# Altium PCB 主板-双BH(1).PcbDoc (part 12 of 13)
Units mm, origin at the board's own origin, x right, y up, seen from the top; angles counter-clockwise.
Board outline 97.69 x 103.45 mm, 2 copper layers (Top Layer, Bottom Layer); 78 components, 75 nets, 243 pads, 279 vias.
Unrouted connection lines stored in the file: 7.
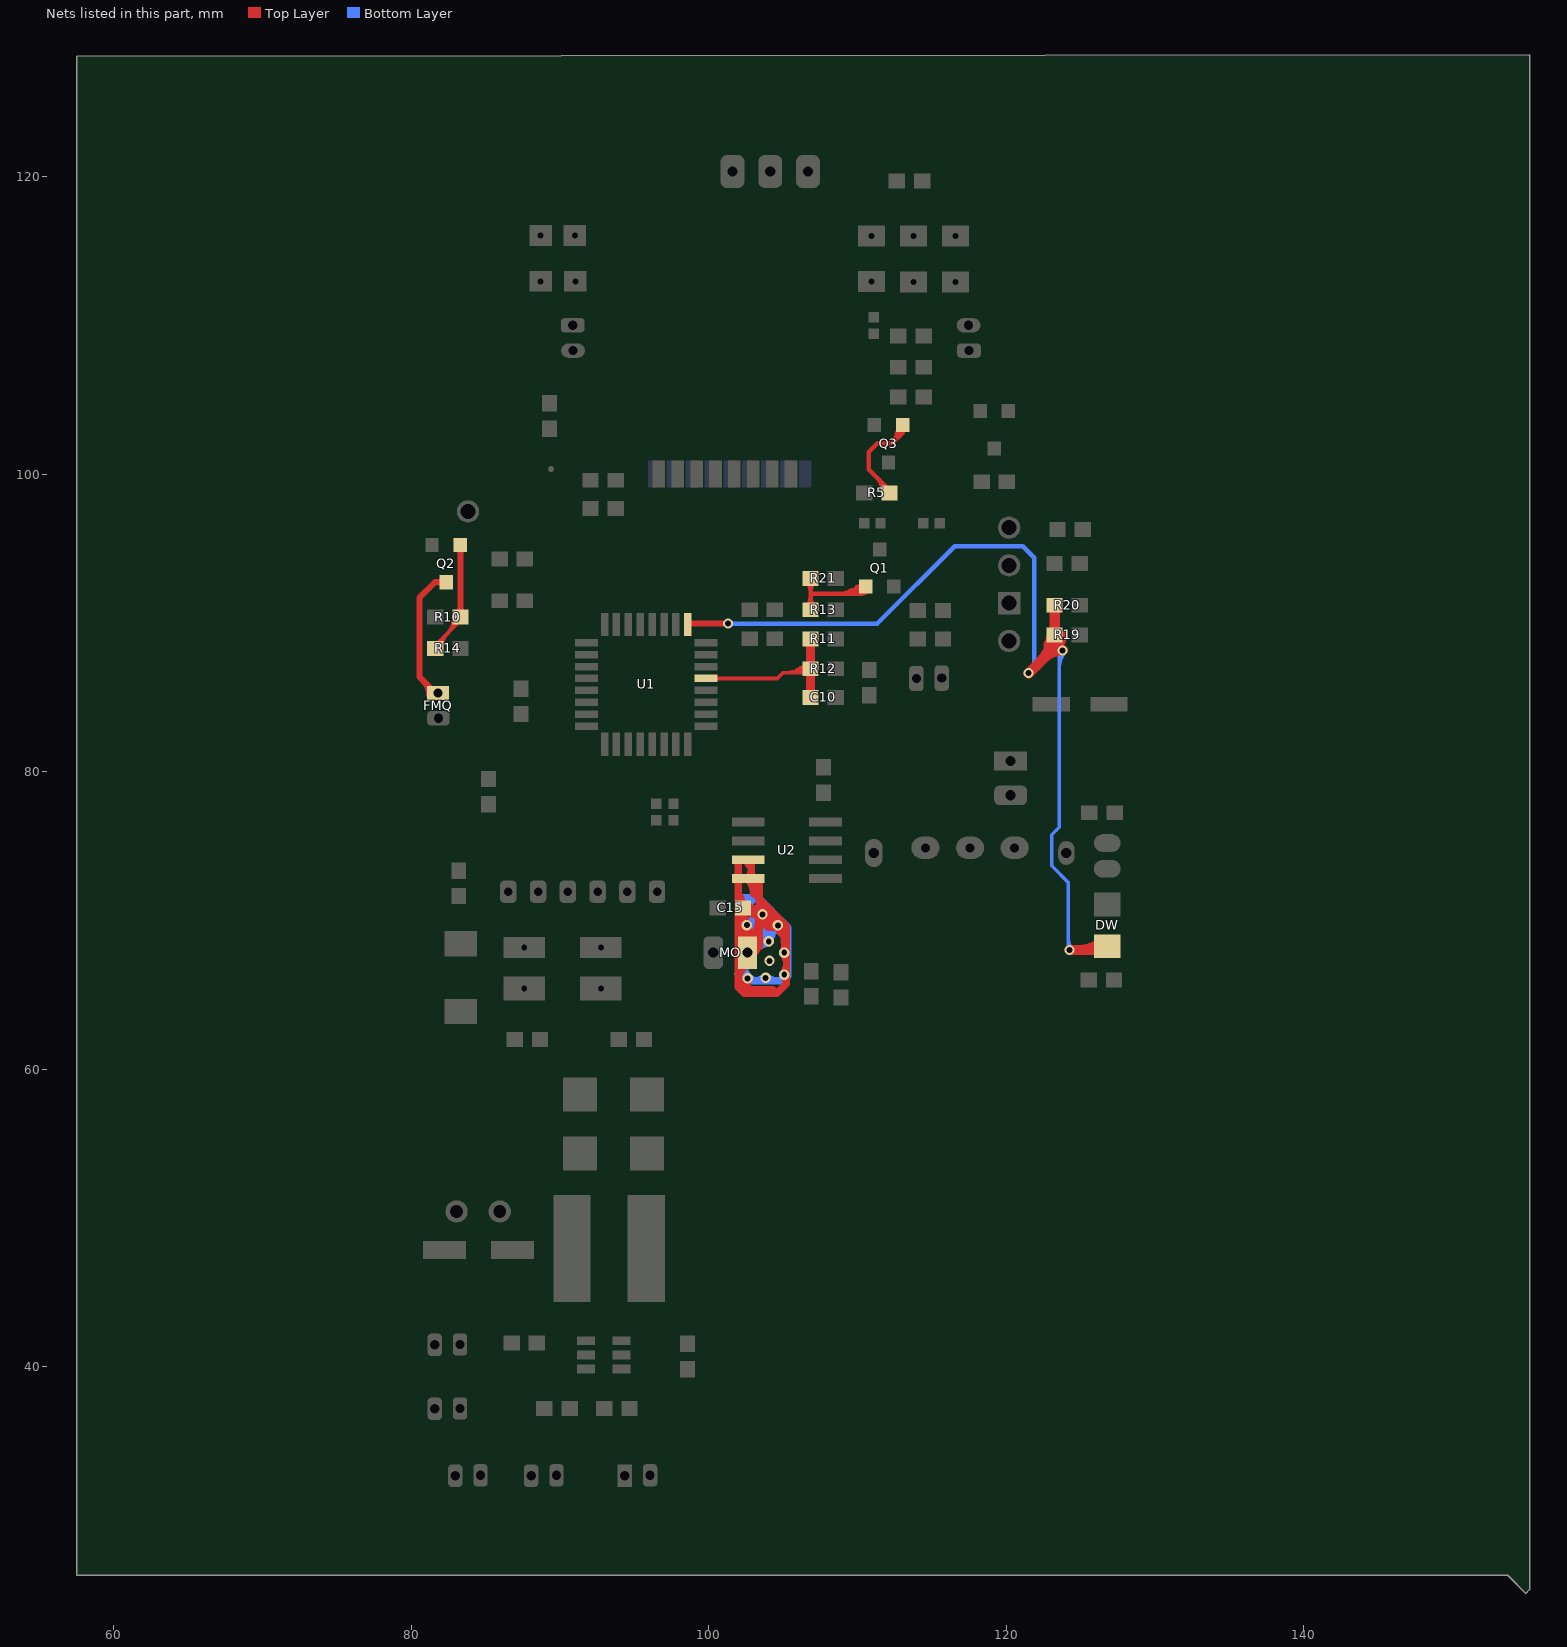
[diagram p12: the nets of this part, all layers, seen from the top]

## Via types
v1: diameter 0.7, hole 0.4, Top Layer to Bottom Layer, 108 vias
v2: diameter 0.68, hole 0.4, Top Layer to Bottom Layer, 87 vias
v3: diameter 0.8, hole 0.5, Top Layer to Bottom Layer, tented both sides, 33 vias
v4: diameter 0.6, hole 0.4, Top Layer to Bottom Layer, 12 vias
v5: diameter 0.9, hole 0.5, Top Layer to Bottom Layer, 8 vias
v6: diameter 0.8, hole 0.5, Top Layer to Bottom Layer, 6 vias
v7: diameter 1, hole 0.75, Top Layer to Bottom Layer, tented both sides, 5 vias
v8: diameter 3.4, hole 2.9, Top Layer to Bottom Layer, 4 vias
v9: diameter 1, hole 0.6, Top Layer to Bottom Layer, tented both sides, 3 vias
v10: diameter 1, hole 0.56, Top Layer to Bottom Layer, tented both sides, 2 vias
v11: diameter 1.1, hole 0.68, Top Layer to Bottom Layer, 2 vias
v12: diameter 0.8, hole 0.4, Top Layer to Bottom Layer, 2 vias
v13: diameter 0.65, hole 0.4, Top Layer to Bottom Layer, tented both sides, 2 vias
v14: diameter 1, hole 0.6, Top Layer to Bottom Layer, tented bottom, 1 vias
v15: diameter 0.7, hole 0.4, Top Layer to Bottom Layer, tented bottom, 1 vias
v16: diameter 0.95, hole 0.5, Top Layer to Bottom Layer, 1 vias
v17: diameter 0.64, hole 0.4, Top Layer to Bottom Layer, 1 vias
v18: diameter 0.62, hole 0.4, Top Layer to Bottom Layer, 1 vias

## Nets (pads, with @x,y where several pads share a name; then routed paths per layer and width w, separated by ;. In a path a pad name is that pad's centre, name@x,y a point inside that pad or via, vN(x,y) a via of type N, cw(c..) or ccw(c..) an arc to the next point about the centre after c; other vN are vias at no path point) (continued)
NetC4_2: C15.2 MO.1 U2.7 U2.8 | length 462.1
  Top Layer w0.5: 101.981,73.762 101.981,66.237 ; 102.389,69.246 ccw(c101.909,69.556) v1@102.467,69.677 ; U2.7@102.654,73.787 102.87,73.787 102.87,72.568 U2.8@103.022,72.568 ; U2.8@103.022,72.695 U2.8@103.022,72.568 ; 103.403,68.224 v1@103.403,70.151 ; 103.403,71.501 103.022,71.882 U2.8@103.022,72.568 ; 104.305,65.354 102.743,65.354 ; v1@104.318,69.621 104.318,69.875 ; U2.8@101.819,72.782 cw(c101.427,72.39) 101.981,72.39 ; U2.8@101.819,72.782 cw(c101.427,72.39) 101.981,72.39 ; U2.8@101.819,72.782 cw(c101.427,72.39) 101.981,72.39 ; U2.8@101.819,72.852 ccw(c101.427,73.244) 101.981,73.244 ; U2.8@101.819,72.852 ccw(c101.427,73.244) 101.981,73.244 ; U2.8@101.819,72.852 ccw(c101.427,73.244) 101.981,73.244 ; U2.7@101.819,74.052 cw(c101.427,73.66) 101.981,73.66 ; U2.7@101.819,74.052 cw(c101.427,73.66) 101.981,73.66 ; U2.7@101.819,74.052 cw(c101.427,73.66) 101.981,73.66 ; U2.7@101.824,74.047 cw(c101.598,73.738) 101.981,73.738 ; U2.7@101.824,74.047 cw(c101.598,73.738) 101.981,73.738 ; U2.7@101.824,74.047 cw(c101.598,73.738) 101.981,73.738 ; 101.981,66.077 cw(c102.938,66.077) MO.1@102.707,67.005 ; 101.981,66.077 cw(c102.938,66.077) MO.1@102.707,67.005 ; 101.981,66.077 cw(c102.938,66.077) MO.1@102.707,67.005 ; 101.981,66.237 101.981,66.116 102.743,65.354 ; 101.981,66.237 101.981,65.507 102.387,65.1 104.572,65.1 105.232,65.761 ; 101.981,66.717 cw(c102.778,66.717) MO.1@102.586,67.49 ; 101.981,66.717 cw(c102.778,66.717) MO.1@102.586,67.49 ; 101.981,66.717 cw(c102.778,66.717) MO.1@102.586,67.49 ; MO.1@101.981,68.046 cw(c104.217,68.046) v1@102.636,69.627 ; MO.1@101.981,68.046 cw(c104.217,68.046) v1@102.636,69.627 ; MO.1@101.981,68.046 cw(c104.217,68.046) v1@102.636,69.627 ; 101.981,69.571 ccw(c103.887,69.571) MO.1@102.539,68.223 ; 101.981,69.571 ccw(c103.887,69.571) MO.1@102.539,68.223 ; 101.981,69.571 ccw(c103.887,69.571) MO.1@102.539,68.223 ; 101.981,69.573 cw(c103.537,69.573) C15.2@102.437,70.673 ; 101.981,69.573 cw(c103.537,69.573) C15.2@102.437,70.673 ; 101.981,69.573 cw(c103.537,69.573) C15.2@102.437,70.673 ; C15.2@101.981,70.778 ccw(c105.094,70.778) MO.1@102.893,68.576 ; C15.2@101.981,70.778 ccw(c105.094,70.778) MO.1@102.893,68.576 ; C15.2@101.981,70.778 ccw(c105.094,70.778) MO.1@102.893,68.576 ; C15.2@101.981,71.349 ccw(c104.217,71.349) v1@102.636,69.768 ; C15.2@101.981,71.349 ccw(c104.217,71.349) v1@102.636,69.768 ; C15.2@101.981,71.349 ccw(c104.217,71.349) v1@102.636,69.768 ; 101.981,72.127 ccw(c103.537,72.127) C15.2@102.437,71.027 ; 101.981,72.127 ccw(c103.537,72.127) C15.2@102.437,71.027 ; 101.981,72.127 ccw(c103.537,72.127) C15.2@102.437,71.027 ; C15.2@102.007,70.658 ccw(c103.37,70.958) v1@102.619,69.782 ; C15.2@102.007,70.658 ccw(c103.37,70.958) v1@102.619,69.782 ; C15.2@102.007,70.658 ccw(c103.37,70.958) v1@102.619,69.782 ; C15.2@102.007,70.658 ccw(c103.37,70.958) v1@102.619,69.782 ; C15.2@102.007,70.658 ccw(c103.37,70.958) v1@102.619,69.782 ; C15.2@102.007,70.658 ccw(c103.37,70.958) v1@102.619,69.782 ; 102.018,69.125 ccw(c102.788,69.57) MO.1@102.665,68.69 ; 102.018,69.125 ccw(c102.788,69.57) MO.1@102.665,68.69 ; 102.018,69.125 ccw(c102.788,69.57) MO.1@102.665,68.69 ; C15.2@102.063,70.697 cw(c101.637,70.366) 102.104,70.097 ; C15.2@102.063,70.697 cw(c101.637,70.366) 102.104,70.097 ; C15.2@102.063,70.697 cw(c101.637,70.366) 102.104,70.097 ; C15.2@102.063,71.003 ccw(c101.637,71.334) 102.104,71.604 ; C15.2@102.063,71.003 ccw(c101.637,71.334) 102.104,71.604 ; C15.2@102.063,71.003 ccw(c101.637,71.334) 102.104,71.604 ; 102.112,70.182 ccw(c102.591,70.287) v1@102.57,69.798 ; 102.112,70.182 ccw(c102.591,70.287) v1@102.57,69.798 ; 102.112,70.182 ccw(c102.591,70.287) v1@102.57,69.798 ; 102.112,70.182 ccw(c102.591,70.287) v1@102.57,69.798 ; 102.112,70.182 ccw(c102.591,70.287) v1@102.57,69.798 ; 102.112,70.182 ccw(c102.591,70.287) v1@102.57,69.798 ; MO.1@102.16,68.879 cw(c101.609,68.561) MO.1@102.224,68.397 ; MO.1@102.16,68.879 cw(c101.609,68.561) MO.1@102.224,68.397 ; MO.1@102.16,68.879 cw(c101.609,68.561) MO.1@102.224,68.397 ; 102.199,69.779 cw(c100.979,69.074) MO.1@102.249,68.466 ; 102.199,69.779 cw(c100.979,69.074) MO.1@102.249,68.466 ; 102.199,69.779 cw(c100.979,69.074) MO.1@102.249,68.466 ; 102.226,69.865 cw(c102.93,70.054) C15.2@102.506,70.647 ; 102.226,69.865 cw(c102.93,70.054) C15.2@102.506,70.647 ; 102.226,69.865 cw(c102.93,70.054) C15.2@102.506,70.647 ; MO.1@102.269,68.855 cw(c103.378,68.8) v1@102.632,69.623 ; MO.1@102.269,68.855 cw(c103.378,68.8) v1@102.632,69.623 ; MO.1@102.269,68.855 cw(c103.378,68.8) v1@102.632,69.623 ; MO.1@102.269,68.855 cw(c103.378,68.8) v1@102.632,69.623 ; 102.316,70.113 cw(c101.895,69.728) v1@102.465,69.702 ; 102.316,70.113 cw(c101.895,69.728) v1@102.465,69.702 ; 102.316,70.113 cw(c101.895,69.728) v1@102.465,69.702 ; 102.316,70.113 cw(c101.895,69.728) v1@102.465,69.702 ; C15.2@102.36,70.6 cw(c102.36,69.164) v1@103.375,70.179 ; C15.2@102.36,70.6 cw(c102.36,69.164) v1@103.375,70.179 ; C15.2@102.36,70.6 cw(c102.36,69.164) v1@103.375,70.179 ; 102.412,69.238 ccw(c101.917,69.524) v1@102.469,69.672 ; 102.412,69.238 ccw(c101.917,69.524) v1@102.469,69.672 ; 102.412,69.238 ccw(c101.917,69.524) v1@102.469,69.672 ; 102.412,70.157 cw(c101.917,69.871) v1@102.469,69.723 ; 102.412,70.157 cw(c101.917,69.871) v1@102.469,69.723 ; 102.412,70.157 cw(c101.917,69.871) v1@102.469,69.723 ; MO.1@102.444,68.657 ccw(c101.76,70.151) v1@103.403,70.151 ; MO.1@102.444,68.657 ccw(c101.76,70.151) v1@103.403,70.151 ; MO.1@102.444,68.657 ccw(c101.76,70.151) v1@103.403,70.151 ; C15.2@102.46,70.621 cw(c102.758,69.942) 103.129,70.584 ; C15.2@102.46,70.621 cw(c102.758,69.942) 103.129,70.584 ; C15.2@102.46,70.621 cw(c102.758,69.942) 103.129,70.584 ; C15.2@102.485,70.634 cw(c102.879,69.952) 103.083,70.712 ; C15.2@102.485,70.634 cw(c102.879,69.952) 103.083,70.712 ; C15.2@102.485,70.634 cw(c102.879,69.952) 103.083,70.712 ; v1@102.492,69.63 cw(c102.073,69.241) 102.644,69.22 ; v1@102.492,69.63 cw(c102.073,69.241) 102.644,69.22 ; v1@102.492,69.63 cw(c102.073,69.241) 102.644,69.22 ; v1@102.492,69.63 cw(c102.073,69.241) 102.644,69.22 ; C15.2@102.537,71.027 ccw(c103.084,71.574) 103.084,70.8 ; C15.2@102.537,71.027 ccw(c103.084,71.574) 103.084,70.8 ; C15.2@102.537,71.027 ccw(c103.084,71.574) 103.084,70.8 ; U2.8@102.619,72.782 cw(c101.656,71.812) 103.022,71.812 ; U2.8@102.619,72.782 cw(c101.656,71.812) 103.022,71.812 ; U2.8@102.619,72.782 cw(c101.656,71.812) 103.022,71.812 ; U2.8@102.619,72.852 ccw(c102.012,73.459) 102.87,73.459 ; U2.8@102.619,72.852 ccw(c102.012,73.459) 102.87,73.459 ; U2.8@102.619,72.852 ccw(c102.012,73.459) 102.87,73.459 ; U2.7@102.619,74.052 cw(c102.012,73.445) 102.87,73.445 ; U2.7@102.619,74.052 cw(c102.012,73.445) 102.87,73.445 ; U2.7@102.619,74.052 cw(c102.012,73.445) 102.87,73.445 ; MO.1@102.652,68.202 ccw(c102.116,69.373) 103.403,69.373 ; MO.1@102.652,68.202 ccw(c102.116,69.373) 103.403,69.373 ; MO.1@102.652,68.202 ccw(c102.116,69.373) 103.403,69.373 ; v1@102.661,69.668 ccw(c103.741,69.336) MO.1@102.814,68.689 ; v1@102.661,69.668 ccw(c103.741,69.336) MO.1@102.814,68.689 ; v1@102.661,69.668 ccw(c103.741,69.336) MO.1@102.814,68.689 ; v1@102.661,69.668 ccw(c103.741,69.336) MO.1@102.814,68.689 ; v1@102.661,69.668 ccw(c103.741,69.336) MO.1@102.814,68.689 ; v1@102.661,69.668 ccw(c103.741,69.336) MO.1@102.814,68.689 ; 102.673,68.957 cw(c102.016,68.578) MO.1@102.7,68.25 ; 102.673,68.957 cw(c102.016,68.578) MO.1@102.7,68.25 ; 102.673,68.957 cw(c102.016,68.578) MO.1@102.7,68.25 ; v1@102.696,66.056 ccw(c103.121,65.732) 102.743,65.354 ; v1@102.696,66.056 ccw(c103.121,65.732) 102.743,65.354 ; v1@102.696,66.056 ccw(c103.121,65.732) 102.743,65.354 ; C15.2@102.755,70.8 cw(c102.755,69.882) v1@103.536,70.364 ; C15.2@102.755,70.8 ccw(c103.466,71.511) v1@103.607,70.515 ; C15.2@102.755,70.8 cw(c102.755,69.882) v1@103.536,70.364 ; C15.2@102.755,70.8 ccw(c103.466,71.511) v1@103.607,70.515 ; C15.2@102.755,70.8 cw(c102.755,69.882) v1@103.536,70.364 ; C15.2@102.755,70.8 ccw(c103.466,71.511) v1@103.607,70.515 ; C15.2@102.755,70.8 103.393,70.8 ; C15.2@102.755,70.8 v1@103.403,70.151 ; MO.1@102.86,67.748 ccw(c102.472,68.594) 103.403,68.594 ; MO.1@102.86,67.748 ccw(c102.472,68.594) 103.403,68.594 ; MO.1@102.86,67.748 ccw(c102.472,68.594) 103.403,68.594 ; 102.896,70.456 ccw(c103.198,70.98) v1@103.561,70.496 ; 102.896,70.456 ccw(c103.198,70.98) v1@103.561,70.496 ; 102.896,70.456 ccw(c103.198,70.98) v1@103.561,70.496 ; 102.896,70.456 ccw(c103.198,70.98) v1@103.561,70.496 ; 102.896,70.456 ccw(c103.198,70.98) v1@103.561,70.496 ; 102.896,70.456 ccw(c103.198,70.98) v1@103.561,70.496 ; MO.1@102.974,68.459 cw(c103.58,68.733) 103.156,69.246 ; MO.1@102.974,68.459 cw(c103.58,68.733) 103.156,69.246 ; MO.1@102.974,68.459 cw(c103.58,68.733) 103.156,69.246 ; U2.8@103.022,72.568 103.403,72.568 103.403,70.79 ; 103.162,70.57 cw(c103.093,70.003) v1@103.542,70.355 ; 103.162,70.57 cw(c103.093,70.003) v1@103.542,70.355 ; 103.162,70.57 cw(c103.093,70.003) v1@103.542,70.355 ; 103.21,70.672 ccw(c103.602,71.087) v1@103.618,70.516 ; 103.21,70.672 ccw(c103.602,71.087) v1@103.618,70.516 ; 103.21,70.672 ccw(c103.602,71.087) v1@103.618,70.516 ; 103.333,69.89 cw(c104.034,69.702) v1@103.671,70.33 ; 103.333,69.89 cw(c104.034,69.702) v1@103.671,70.33 ; 103.333,69.89 cw(c104.034,69.702) v1@103.671,70.33 ; 103.333,69.89 cw(c104.034,69.702) v1@103.671,70.33 ; 103.333,69.89 cw(c104.034,69.702) v1@103.671,70.33 ; 103.333,69.89 cw(c104.034,69.702) v1@103.671,70.33 ; 103.393,70.8 cw(c103.075,70.482) v1@103.522,70.428 ; 103.393,70.8 cw(c103.075,70.482) v1@103.522,70.428 ; 103.393,70.8 cw(c103.075,70.482) v1@103.522,70.428 ; 103.393,70.8 103.403,70.79 ; 103.403,69.65 cw(c104.388,69.65) v1@103.692,70.346 ; 103.403,69.65 cw(c104.388,69.65) v1@103.692,70.346 ; 103.403,69.65 cw(c104.388,69.65) v1@103.692,70.346 ; v1@103.403,70.151 104.01,69.545 ; v1@103.403,70.151 103.403,70.714 ; 103.403,70.714 103.403,70.79 ; 103.403,70.714 v1@103.48,70.714 ; 103.403,70.79 ccw(c103.682,70.79) v1@103.637,70.515 ; 103.403,70.79 cw(c103.106,70.492) v1@103.522,70.431 ; 103.403,70.79 cw(c103.106,70.492) v1@103.522,70.431 ; 103.403,70.79 ccw(c103.682,70.79) v1@103.637,70.515 ; 103.403,70.79 ccw(c103.682,70.79) v1@103.637,70.515 ; 103.403,70.79 cw(c103.106,70.492) v1@103.522,70.431 ; 103.403,70.79 cw(c103.106,70.492) v1@103.522,70.431 ; 103.403,70.79 ccw(c103.682,70.79) v1@103.637,70.515 ; 103.403,70.79 ccw(c103.682,70.79) v1@103.637,70.515 ; 103.403,70.79 cw(c103.106,70.492) v1@103.522,70.431 ; 103.403,70.79 cw(c103.106,70.492) v1@103.522,70.431 ; 103.403,70.79 ccw(c103.682,70.79) v1@103.637,70.515 ; 103.403,70.79 v1@103.48,70.714 ; 103.403,71.183 ccw(c104.388,71.183) v1@103.692,70.487 ; 103.403,71.183 ccw(c104.388,71.183) v1@103.692,70.487 ; 103.403,71.183 ccw(c104.388,71.183) v1@103.692,70.487 ; 103.403,71.45 cw(c102.826,70.873) v1@103.534,70.466 ; 103.403,71.45 cw(c102.826,70.873) v1@103.534,70.466 ; 103.403,71.45 cw(c102.826,70.873) v1@103.534,70.466 ; 103.403,71.45 105.232,69.621 105.232,65.761 ; 103.406,70.064 ccw(c103.118,70.353) v1@103.522,70.404 ; 103.406,70.064 ccw(c103.118,70.353) v1@103.522,70.404 ; 103.406,70.064 ccw(c103.118,70.353) v1@103.522,70.404 ; 103.406,70.064 ccw(c103.118,70.353) v1@103.522,70.404 ; 103.467,69.957 ccw(c102.973,70.243) v1@103.524,70.391 ; 103.467,69.957 ccw(c102.973,70.243) v1@103.524,70.391 ; 103.467,69.957 ccw(c102.973,70.243) v1@103.524,70.391 ; 103.467,70.876 cw(c102.973,70.59) v1@103.524,70.442 ; 103.467,70.876 cw(c102.973,70.59) v1@103.524,70.442 ; 103.467,70.876 cw(c102.973,70.59) v1@103.524,70.442 ; v1@103.48,70.714 103.632,70.714 104.8,69.545 104.01,69.545 ; v1@103.48,70.714 104.318,69.875 ; v1@103.56,70.337 cw(c103.21,69.885) 103.777,69.958 ; v1@103.56,70.337 cw(c103.21,69.885) 103.777,69.958 ; v1@103.56,70.337 cw(c103.21,69.885) 103.777,69.958 ; v1@103.621,70.316 cw(c103.621,69.331) 104.318,70.028 ; v1@103.621,70.316 cw(c103.621,69.699) 104.058,70.136 ; v1@103.621,70.316 cw(c103.621,68.105) 105.185,69.669 ; v1@103.621,70.316 cw(c103.621,69.331) 104.318,70.028 ; v1@103.621,70.316 cw(c103.621,69.699) 104.058,70.136 ; v1@103.621,70.316 cw(c103.621,68.105) 105.185,69.669 ; v1@103.621,70.316 cw(c103.621,69.331) 104.318,70.028 ; v1@103.621,70.316 cw(c103.621,69.699) 104.058,70.136 ; v1@103.621,70.316 cw(c103.621,68.105) 105.185,69.669 ; v1@103.708,70.466 ccw(c104.202,70.752) 104.054,70.2 ; v1@103.708,70.466 ccw(c104.202,70.752) 104.054,70.2 ; v1@103.708,70.466 ccw(c104.202,70.752) 104.054,70.2 ; v1@103.708,70.466 ccw(c104.202,70.752) 104.054,70.2 ; v1@103.708,70.466 ccw(c104.202,70.752) 104.054,70.2 ; v1@103.708,70.466 ccw(c104.202,70.752) 104.054,70.2 ; v1@103.708,70.466 ccw(c104.202,70.752) 104.054,70.2 ; v1@103.708,70.466 ccw(c104.202,70.752) 104.054,70.2 ; v1@103.708,70.466 ccw(c104.202,70.752) 104.054,70.2 ; v1@103.72,70.403 ccw(c104.731,70.266) 104.01,69.545 ; v1@103.72,70.403 ccw(c104.731,70.266) 104.01,69.545 ; v1@103.72,70.403 ccw(c104.731,70.266) 104.01,69.545 ; v1@103.785,70.266 cw(c103.399,69.011) v1@104.56,69.625 ; v1@103.785,70.266 cw(c103.399,69.011) v1@104.56,69.625 ; v1@103.785,70.266 cw(c103.399,69.011) v1@104.56,69.625 ; v1@103.785,70.266 cw(c103.399,69.011) v1@104.56,69.625 ; v1@103.785,70.266 cw(c103.399,69.011) v1@104.56,69.625 ; v1@103.785,70.266 cw(c103.399,69.011) v1@104.56,69.625 ; 104.1,69.545 ccw(c104.1,70.22) v1@104.577,69.743 ; 104.1,69.545 ccw(c104.1,70.22) v1@104.577,69.743 ; 104.1,69.545 ccw(c104.1,70.22) v1@104.577,69.743 ; 104.1,70.753 cw(c103.019,69.672) v1@104.548,69.672 ; 104.1,70.753 cw(c103.019,69.672) v1@104.548,69.672 ; 104.1,70.753 cw(c103.019,69.672) v1@104.548,69.672 ; 104.254,69.954 ccw(c104.673,70.343) v1@104.652,69.772 ; 104.254,69.954 ccw(c104.673,70.343) v1@104.652,69.772 ; 104.254,69.954 ccw(c104.673,70.343) v1@104.652,69.772 ; 104.254,69.954 ccw(c104.673,70.343) v1@104.652,69.772 ; 104.26,69.933 ccw(c104.648,70.32) v1@104.648,69.772 ; 104.26,69.933 ccw(c104.648,70.32) v1@104.648,69.772 ; 104.26,69.933 ccw(c104.648,70.32) v1@104.648,69.772 ; 104.318,69.875 ccw(c104.579,70.137) v1@104.633,69.771 ; 104.318,69.875 ccw(c104.579,70.137) v1@104.633,69.771 ; 104.318,69.875 ccw(c104.579,70.137) v1@104.633,69.771 ; 104.432,70.106 ccw(c104.984,70.253) v1@104.698,69.759 ; 104.432,70.106 ccw(c104.984,70.253) v1@104.698,69.759 ; 104.432,70.106 ccw(c104.984,70.253) v1@104.698,69.759 ; v1@104.577,69.601 cw(c102.996,68.02) v1@105.232,68.02 ; v1@104.577,69.601 cw(c102.996,68.02) v1@105.232,68.02 ; v1@104.577,69.601 cw(c102.996,68.02) v1@105.232,68.02 ; v1@104.745,69.646 ccw(c105.296,69.498) 104.802,69.213 ; v1@104.745,69.646 ccw(c105.296,69.498) 104.802,69.213 ; v1@104.745,69.646 ccw(c105.296,69.498) 104.802,69.213 ; v1@104.993,67.893 ccw(c104.213,68.344) 105.083,68.577 ; v1@104.993,67.893 ccw(c104.213,68.344) 105.083,68.577 ; v1@104.993,67.893 ccw(c104.213,68.344) 105.083,68.577 ; v1@105.009,66.299 cw(c104.47,65.761) 105.232,65.761 ; v1@105.009,66.299 cw(c104.47,65.761) 105.232,65.761 ; v1@105.009,66.299 cw(c104.47,65.761) 105.232,65.761 ; v1@105.009,66.441 ccw(c104.47,66.98) 105.232,66.98 ; v1@105.009,66.441 ccw(c104.47,66.98) 105.232,66.98 ; v1@105.009,66.441 ccw(c104.47,66.98) 105.232,66.98 ; v1@105.009,67.773 cw(c104.47,67.234) 105.232,67.234 ; v1@105.009,67.773 cw(c104.47,67.234) 105.232,67.234 ; v1@105.009,67.773 cw(c104.47,67.234) 105.232,67.234 ; v1@105.009,67.914 ccw(c104.47,68.453) 105.232,68.453 ; v1@105.009,67.914 ccw(c104.47,68.453) 105.232,68.453 ; v1@105.009,67.914 ccw(c104.47,68.453) 105.232,68.453 ; v1@105.169,66.325 ccw(c105.469,66.174) 105.178,66.006 ; v1@105.169,66.325 ccw(c105.469,66.174) 105.178,66.006 ; v1@105.169,66.325 ccw(c105.469,66.174) 105.178,66.006 ; v1@105.169,66.415 cw(c105.469,66.566) 105.178,66.734 ; v1@105.169,66.415 cw(c105.469,66.566) 105.178,66.734 ; v1@105.169,66.415 cw(c105.469,66.566) 105.178,66.734 ; v1@105.169,67.798 ccw(c105.469,67.648) 105.178,67.48 ; v1@105.169,67.798 ccw(c105.469,67.648) 105.178,67.48 ; v1@105.169,67.798 ccw(c105.469,67.648) 105.178,67.48 ; v1@105.169,67.888 cw(c105.469,68.039) 105.178,68.207 ; v1@105.169,67.888 cw(c105.469,68.039) 105.178,68.207 ; v1@105.169,67.888 cw(c105.469,68.039) 105.178,68.207
  Bottom Layer w0.5: 102.083,70.671 cw(c102.938,70.671) 102.333,71.276 ; MO.1@102.616,68.17 v1@102.616,69.571 ; 102.715,70.981 cw(c103.327,70.91) 103.327,71.526 ; 105.105,69.748 105.334,69.52 ; 102,66.41 ccw(c102.406,66.644) v1@102.579,66.209 ; 102,66.41 ccw(c102.406,66.644) v1@102.579,66.209 ; 102,66.41 ccw(c102.406,66.644) v1@102.579,66.209 ; 102.064,70.629 ccw(c103.367,70.877) v1@102.621,69.78 ; 102.064,70.629 ccw(c103.367,70.877) v1@102.621,69.78 ; 102.064,70.629 ccw(c103.367,70.877) v1@102.621,69.78 ; 102.064,70.629 ccw(c103.367,70.877) v1@102.621,69.78 ; 102.064,70.629 ccw(c103.367,70.877) v1@102.621,69.78 ; 102.064,70.629 ccw(c103.367,70.877) v1@102.621,69.78 ; 102.083,66.22 cw(c102.889,66.22) MO.1@102.703,67.004 ; 102.083,66.22 cw(c102.889,66.22) MO.1@102.703,67.004 ; 102.083,66.22 cw(c102.889,66.22) MO.1@102.703,67.004 ; 102.083,66.345 ccw(c102.449,66.711) v1@102.589,66.212 ; 102.083,66.345 ccw(c102.449,66.711) v1@102.589,66.212 ; 102.083,66.345 ccw(c102.449,66.711) v1@102.589,66.212 ; 102.083,66.345 102.484,65.944 105.034,65.944 105.334,66.243 105.334,69.52 ; 102.083,66.345 102.083,71.526 103.327,71.526 ; 102.083,66.438 ccw(c102.938,66.438) 102.333,65.833 ; 102.083,66.438 ccw(c102.938,66.438) 102.333,65.833 ; 102.083,66.438 ccw(c102.938,66.438) 102.333,65.833 ; MO.1@102.083,66.852 cw(c102.739,66.852) MO.1@102.587,67.491 ; MO.1@102.083,66.852 cw(c102.739,66.852) MO.1@102.587,67.491 ; MO.1@102.083,66.852 cw(c102.739,66.852) MO.1@102.587,67.491 ; MO.1@102.083,67.645 ccw(c104.145,67.645) v1@102.687,66.187 ; MO.1@102.083,67.645 ccw(c104.145,67.645) v1@102.687,66.187 ; MO.1@102.083,67.645 ccw(c104.145,67.645) v1@102.687,66.187 ; MO.1@102.083,68.291 cw(c103.972,68.291) v1@102.636,69.627 ; MO.1@102.083,68.291 cw(c103.972,68.291) v1@102.636,69.627 ; MO.1@102.083,68.291 cw(c103.972,68.291) v1@102.636,69.627 ; 102.083,69.325 ccw(c103.642,69.325) MO.1@102.539,68.223 ; 102.083,69.325 ccw(c103.642,69.325) MO.1@102.539,68.223 ; 102.083,69.325 ccw(c103.642,69.325) MO.1@102.539,68.223 ; 102.083,69.498 cw(c102.765,69.498) 102.282,69.98 ; 102.083,69.498 cw(c102.765,69.498) 102.282,69.98 ; 102.083,69.498 cw(c102.765,69.498) 102.282,69.98 ; 102.083,69.897 ccw(c102.765,69.897) 102.282,69.415 ; 102.083,69.897 ccw(c102.765,69.897) 102.282,69.415 ; 102.083,69.897 ccw(c102.765,69.897) 102.282,69.415 ; 102.083,70.532 ccw(c104.849,70.532) MO.1@102.893,68.576 ; 102.083,70.532 ccw(c104.849,70.532) MO.1@102.893,68.576 ; 102.083,70.532 ccw(c104.849,70.532) MO.1@102.893,68.576 ; 102.083,71.104 ccw(c103.972,71.104) v1@102.636,69.768 ; 102.083,71.104 ccw(c103.972,71.104) v1@102.636,69.768 ; 102.083,71.104 ccw(c103.972,71.104) v1@102.636,69.768 ; MO.1@102.27,68.505 ccw(c101.346,69.079) v1@102.288,69.623 ; MO.1@102.27,68.505 ccw(c101.346,69.079) v1@102.288,69.623 ; MO.1@102.27,68.505 ccw(c101.346,69.079) v1@102.288,69.623 ; 102.29,69.443 ccw(c102.407,69.465) 102.34,69.367 ; 102.29,69.443 ccw(c102.407,69.465) 102.34,69.367 ; 102.29,69.443 ccw(c102.407,69.465) 102.34,69.367 ; 102.29,69.443 ccw(c102.407,69.465) 102.34,69.367 ; 102.29,69.443 ccw(c102.407,69.465) 102.34,69.367 ; 102.29,69.443 ccw(c102.407,69.465) 102.34,69.367 ; MO.1@102.327,68.576 ccw(c101.63,69.274) 102.616,69.274 ; MO.1@102.327,68.576 ccw(c101.038,69.869) v1@102.863,69.869 ; MO.1@102.327,68.576 ccw(c101.63,69.274) 102.616,69.274 ; MO.1@102.327,68.576 ccw(c101.038,69.869) v1@102.863,69.869 ; MO.1@102.327,68.576 ccw(c101.63,69.274) 102.616,69.274 ; MO.1@102.327,68.576 ccw(c101.038,69.869) v1@102.863,69.869 ; 102.328,70.12 cw(c101.896,69.747) v1@102.465,69.705 ; 102.328,70.12 cw(c101.896,69.747) v1@102.465,69.705 ; 102.328,70.12 cw(c101.896,69.747) v1@102.465,69.705 ; 102.328,70.12 cw(c101.896,69.747) v1@102.465,69.705 ; 102.412,69.238 ccw(c101.917,69.524) v1@102.469,69.672 ; 102.412,69.238 ccw(c101.917,69.524) v1@102.469,69.672 ; 102.412,69.238 ccw(c101.917,69.524) v1@102.469,69.672 ; 102.412,70.157 cw(c101.917,69.871) v1@102.469,69.723 ; 102.412,70.157 cw(c101.917,69.871) v1@102.469,69.723 ; 102.412,70.157 cw(c101.917,69.871) v1@102.469,69.723 ; 102.462,66.576 cw(c101.968,66.29) v1@102.519,66.142 ; 102.462,66.576 cw(c101.968,66.29) v1@102.519,66.142 ; 102.462,66.576 cw(c101.968,66.29) v1@102.519,66.142 ; v1@102.494,69.627 cw(c102.201,69.334) 102.616,69.334 ; v1@102.494,69.627 cw(c101.604,68.736) MO.1@102.863,68.736 ; v1@102.494,69.627 cw(c102.201,69.334) 102.616,69.334 ; v1@102.494,69.627 cw(c101.604,68.736) MO.1@102.863,68.736 ; v1@102.494,69.627 cw(c102.201,69.334) 102.616,69.334 ; v1@102.494,69.627 cw(c101.604,68.736) MO.1@102.863,68.736 ; v1@102.494,69.628 cw(c102.085,69.229) 102.656,69.222 ; v1@102.494,69.628 cw(c102.085,69.229) 102.656,69.222 ; v1@102.494,69.628 cw(c102.085,69.229) 102.656,69.222 ; v1@102.494,69.628 cw(c102.085,69.229) 102.656,69.222 ; MO.1@102.523,68.343 cw(c103.457,67.805) MO.1@103.178,68.846 ; MO.1@102.523,68.343 cw(c103.457,67.805) MO.1@103.178,68.846 ; MO.1@102.523,68.343 cw(c103.457,67.805) MO.1@103.178,68.846 ; MO.1@102.61,68.193 ccw(c102.61,69.65) 103.64,68.62 ; MO.1@102.61,68.193 ccw(c102.61,69.65) 103.64,68.62 ; MO.1@102.61,68.193 ccw(c102.61,69.65) 103.64,68.62 ; MO.1@102.61,68.693 ccw(c102.61,71.357) v1@104.494,69.474 ; MO.1@102.61,68.693 ccw(c102.61,71.357) v1@104.494,69.474 ; MO.1@102.61,68.693 ccw(c102.61,71.357) v1@104.494,69.474 ; 102.616,69.245 ccw(c103.561,69.245) MO.1@102.893,68.576 ; 102.616,69.245 ccw(c103.561,69.245) MO.1@102.893,68.576 ; 102.616,69.245 ccw(c103.561,69.245) MO.1@102.893,68.576 ; v1@102.654,66.024 cw(c102.808,65.65) 103.01,66 ; v1@102.654,66.024 cw(c102.808,65.65) 103.01,66 ; v1@102.654,66.024 cw(c102.808,65.65) 103.01,66 ; v1@102.661,69.671 ccw(c103.801,69.35) MO.1@102.812,68.7 ; v1@102.661,69.671 ccw(c103.801,69.35) MO.1@102.812,68.7 ; v1@102.661,69.671 ccw(c103.801,69.35) MO.1@102.812,68.7 ; v1@102.661,69.671 ccw(c103.801,69.35) MO.1@102.812,68.7 ; v1@102.661,69.671 ccw(c103.801,69.35) MO.1@102.812,68.7 ; v1@102.661,69.671 ccw(c103.801,69.35) MO.1@102.812,68.7 ; v1@102.662,69.672 ccw(c103.214,69.524) 102.719,69.238 ; v1@102.662,69.672 ccw(c103.214,69.524) 102.719,69.238 ; v1@102.662,69.672 ccw(c103.214,69.524) 102.719,69.238 ; v1@102.687,66.187 ccw(c103.273,66.774) 103.273,65.944 ; v1@102.687,66.187 ccw(c103.273,66.774) 103.273,65.944 ; v1@102.687,66.187 ccw(c103.273,66.774) 103.273,65.944 ; 102.689,69.202 ccw(c103.06,68.988) MO.1@102.827,68.629 ; 102.689,69.202 ccw(c103.06,68.988) MO.1@102.827,68.629 ; 102.689,69.202 ccw(c103.06,68.988) MO.1@102.827,68.629 ; 102.848,69.98 cw(c102.811,69.943) 102.863,69.943 ; 102.848,69.98 cw(c102.811,69.943) 102.863,69.943 ; 102.848,69.98 cw(c102.811,69.943) 102.863,69.943 ; v1@102.863,69.869 102.863,67.843 v1@104.616,69.596 ; MO.1@102.956,68.494 ccw(c103.31,68.7) 103.514,68.346 ; MO.1@102.956,68.494 ccw(c103.31,68.7) 103.514,68.346 ; MO.1@102.956,68.494 ccw(c103.31,68.7) 103.514,68.346 ; 103.116,65.944 ccw(c103.116,66.86) v1@103.764,66.212 ; 103.116,65.944 ccw(c103.116,66.86) v1@103.764,66.212 ; 103.116,65.944 ccw(c103.116,66.86) v1@103.764,66.212 ; MO.1@103.163,68.143 cw(c104.038,67.267) v1@104.038,68.505 ; MO.1@103.163,68.143 cw(c104.038,67.267) v1@104.038,68.505 ; MO.1@103.163,68.143 cw(c104.038,67.267) v1@104.038,68.505 ; 103.327,71.526 cw(c102.644,70.843) v1@103.529,70.456 ; 103.327,71.526 cw(c102.644,70.843) v1@103.529,70.456 ; 103.327,71.526 cw(c102.644,70.843) v1@103.529,70.456 ; 103.327,71.526 105.258,69.596 ; 103.402,66.003 cw(c103.652,65.569) v1@103.805,66.046 ; 103.402,66.003 cw(c103.652,65.569) v1@103.805,66.046 ; 103.402,66.003 cw(c103.652,65.569) v1@103.805,66.046 ; 103.441,68.876 cw(c103.532,68.459) v1@103.942,68.578 ; 103.441,68.876 cw(c103.532,68.459) v1@103.942,68.578 ; 103.441,68.876 cw(c103.532,68.459) v1@103.942,68.578 ; 103.441,68.876 cw(c103.532,68.459) v1@103.942,68.578 ; 103.441,68.876 cw(c103.532,68.459) v1@103.942,68.578 ; 103.441,68.876 cw(c103.532,68.459) v1@103.942,68.578 ; v1@103.55,70.346 cw(c103.169,69.965) 103.708,69.965 ; v1@103.55,70.346 cw(c103.169,69.965) 103.708,69.965 ; v1@103.55,70.346 cw(c103.169,69.965) 103.708,69.965 ; v1@103.556,70.34 cw(c103.185,69.906) 103.754,69.951 ; v1@103.556,70.34 cw(c103.185,69.906) 103.754,69.951 ; v1@103.556,70.34 cw(c103.185,69.906) 103.754,69.951 ; v1@103.557,70.339 cw(c103.291,70.018) 103.708,70.018 ; v1@103.557,70.339 cw(c103.291,70.018) 103.708,70.018 ; v1@103.557,70.339 cw(c103.291,70.018) 103.708,70.018 ; v1@103.565,70.334 cw(c103.088,69.631) 103.937,69.631 ; v1@103.565,70.334 cw(c103.088,69.631) 103.937,69.631 ; v1@103.565,70.334 cw(c103.088,69.631) 103.937,69.631 ; 103.605,68.389 ccw(c103.457,68.941) v1@103.952,68.655 ; 103.605,68.389 ccw(c103.457,68.941) v1@103.952,68.655 ; 103.605,68.389 ccw(c103.457,68.941) v1@103.952,68.655 ; v1@103.621,70.316 cw(c103.621,69.654) 104.09,70.122 ; v1@103.621,70.316 cw(c103.621,68.105) 105.185,69.669 ; v1@103.621,70.316 cw(c103.621,69.654) 104.09,70.122 ; v1@103.621,70.316 cw(c103.621,68.105) 105.185,69.669 ; v1@103.621,70.316 cw(c103.621,69.654) 104.09,70.122 ; v1@103.621,70.316 cw(c103.621,68.105) 105.185,69.669 ; v1@103.696,70.35 ccw(c103.927,70.145) 103.708,69.926 ; v1@103.696,70.35 ccw(c103.927,70.145) 103.708,69.926 ; v1@103.696,70.35 ccw(c103.927,70.145) 103.708,69.926 ; 103.708,69.926 103.708,70.028 103.632,69.952 103.632,69.494 103.759,69.367 103.937,69.545 103.937,69.698 ; 103.708,69.926 103.937,69.698 ; v1@103.708,70.466 ccw(c104.202,70.752) 104.054,70.2 ; v1@103.708,70.466 ccw(c104.202,70.752) 104.054,70.2 ; v1@103.708,70.466 ccw(c104.202,70.752) 104.054,70.2 ; v1@103.719,70.398 ccw(c104.494,70.254) 103.937,69.698 ; v1@103.719,70.398 ccw(c104.494,70.254) 103.937,69.698 ; v1@103.719,70.398 ccw(c104.494,70.254) 103.937,69.698 ; v1@103.72,70.405 ccw(c104.233,70.349) 103.843,70.012 ; v1@103.72,70.405 ccw(c104.233,70.349) 103.843,70.012 ; v1@103.72,70.405 ccw(c104.233,70.349) 103.843,70.012 ; v1@103.785,70.266 cw(c103.399,69.011) v1@104.56,69.625 ; v1@103.785,70.266 cw(c103.399,69.011) v1@104.56,69.625 ; v1@103.785,70.266 cw(c103.399,69.011) v1@104.56,69.625 ; v1@103.785,70.266 cw(c103.399,69.011) v1@104.56,69.625 ; v1@103.785,70.266 cw(c103.399,69.011) v1@104.56,69.625 ; v1@103.785,70.266 cw(c103.399,69.011) v1@104.56,69.625 ; v1@103.866,66.046 cw(c104.018,65.569) 104.268,66.003 ; v1@103.866,66.046 cw(c104.018,65.569) 104.268,66.003 ; v1@103.866,66.046 cw(c104.018,65.569) 104.268,66.003 ; v1@103.906,66.212 ccw(c104.554,66.86) 104.554,65.944 ; v1@103.906,66.212 ccw(c104.554,66.86) 104.554,65.944 ; v1@103.906,66.212 ccw(c104.554,66.86) 104.554,65.944 ; 103.937,69.698 v1@103.937,70.275 ; 103.937,69.698 104.038,69.596 v1@104.616,69.596 ; v1@103.937,70.275 103.937,70.421 103.625,70.732 103.48,70.732 v1@103.937,70.275 ; v1@103.937,70.275 v1@104.616,69.596 ; v1@103.987,68.691 ccw(c103.693,69.181) 104.247,69.042 ; v1@103.987,68.691 ccw(c103.693,69.181) 104.247,69.042 ; v1@103.987,68.691 ccw(c103.693,69.181) 104.247,69.042 ; v1@103.987,68.691 ccw(c103.693,69.181) 104.247,69.042 ; v1@103.988,68.692 ccw(c103.703,69.187) 104.255,69.039 ; v1@103.988,68.692 ccw(c103.703,69.187) 104.255,69.039 ; v1@103.988,68.692 ccw(c103.703,69.187) 104.255,69.039 ; 104.1,70.753 cw(c103.019,69.672) v1@104.548,69.672 ; 104.1,70.753 cw(c103.019,69.672) v1@104.548,69.672 ; 104.1,70.753 cw(c103.019,69.672) v1@104.548,69.672 ; v1@104.138,68.605 cw(c105.377,68.605) v1@104.501,69.481 ; v1@104.138,68.605 cw(c105.377,68.605) v1@104.501,69.481 ; v1@104.138,68.605 cw(c105.377,68.605) v1@104.501,69.481 ; v1@104.138,68.607 cw(c105.288,68.626) v1@104.63,69.569 ; v1@104.138,68.607 cw(c105.288,68.626) v1@104.63,69.569 ; v1@104.138,68.607 cw(c105.288,68.626) v1@104.63,69.569 ; v1@104.138,68.607 cw(c105.288,68.626) v1@104.63,69.569 ; v1@104.138,68.607 cw(c105.288,68.626) v1@104.63,69.569 ; v1@104.138,68.607 cw(c105.288,68.626) v1@104.63,69.569 ; 104.223,69.596 ccw(c104.223,70.098) v1@104.577,69.743 ; 104.223,69.596 ccw(c104.223,70.098) v1@104.577,69.743 ; 104.223,69.596 ccw(c104.223,70.098) v1@104.577,69.743 ; 104.254,69.954 ccw(c104.673,70.343) v1@104.652,69.772 ; 104.254,69.954 ccw(c104.673,70.343) v1@104.652,69.772 ; 104.254,69.954 ccw(c104.673,70.343) v1@104.652,69.772 ; 104.254,69.954 ccw(c104.673,70.343) v1@104.652,69.772 ; 104.288,69.355 ccw(c104.006,69.844) v1@104.551,69.698 ; 104.288,69.355 ccw(c104.006,69.844) v1@104.551,69.698 ; 104.288,69.355 ccw(c104.006,69.844) v1@104.551,69.698 ; 104.288,69.355 ccw(c104.006,69.844) v1@104.551,69.698 ; 104.288,69.355 ccw(c104.006,69.844) v1@104.551,69.698 ; 104.288,69.355 ccw(c104.006,69.844) v1@104.551,69.698 ; 104.293,69.919 ccw(c104.648,70.275) v1@104.648,69.772 ; 104.293,69.919 ccw(c104.648,70.275) v1@104.648,69.772 ; 104.293,69.919 ccw(c104.648,70.275) v1@104.648,69.772 ; 104.37,69.96 cw(c104.632,69.689) 104.898,69.955 ; 104.37,69.96 cw(c104.632,69.689) 104.898,69.955 ; 104.37,69.96 cw(c104.632,69.689) 104.898,69.955 ; 104.432,70.009 cw(c104.632,69.697) 104.895,69.959 ; 104.432,70.009 cw(c104.632,69.697) 104.895,69.959 ; 104.432,70.009 cw(c104.632,69.697) 104.895,69.959 ; 104.432,70.106 ccw(c104.984,70.253) v1@104.698,69.759 ; 104.432,70.106 ccw(c104.984,70.253) v1@104.698,69.759 ; 104.432,70.106 ccw(c104.984,70.253) v1@104.698,69.759 ; 104.45,69.355 ccw(c104.127,69.628) v1@104.548,69.664 ; 104.45,69.355 ccw(c104.127,69.628) v1@104.548,69.664 ; 104.45,69.355 ccw(c104.127,69.628) v1@104.548,69.664 ; 104.45,69.355 ccw(c104.127,69.628) v1@104.548,69.664 ; 104.45,69.355 ccw(c104.127,69.628) v1@104.548,69.664 ; 104.45,69.355 ccw(c104.127,69.628) v1@104.548,69.664 ; 104.45,69.355 ccw(c104.127,69.628) v1@104.548,69.664 ; 104.45,69.355 ccw(c104.127,69.628) v1@104.548,69.664 ; 104.45,69.355 ccw(c104.127,69.628) v1@104.548,69.664 ; 104.45,69.355 ccw(c104.127,69.628) v1@104.548,69.664 ; v1@104.616,69.596 105.258,69.596 ; v1@104.702,69.588 cw(c104.976,69.162) 105.334,69.52 ; v1@104.702,69.588 cw(c104.976,69.162) 105.334,69.52 ; v1@104.702,69.588 cw(c104.976,69.162) 105.334,69.52 ; v1@104.718,69.6 cw(c104.985,69.324) 105.258,69.596 ; v1@104.718,69.6 cw(c104.985,69.324) 105.258,69.596 ; v1@104.718,69.6 cw(c104.985,69.324) 105.258,69.596 ; v1@104.719,69.743 ccw(c105.073,70.098) 105.073,69.596 ; v1@104.719,69.743 ccw(c105.073,70.098) 105.073,69.596 ; v1@104.719,69.743 ccw(c105.073,70.098) 105.073,69.596 ; 104.939,69.911 cw(c104.908,69.81) 105.001,69.859 ; 104.939,69.911 cw(c104.908,69.81) 105.001,69.859 ; 104.939,69.911 cw(c104.908,69.81) 105.001,69.859 ; 104.939,69.911 cw(c104.908,69.81) 105.001,69.859 ; 104.939,69.911 cw(c104.908,69.81) 105.001,69.859 ; 104.939,69.911 cw(c104.908,69.81) 105.001,69.859 ; 104.954,69.9 cw(c104.726,69.672) 105.048,69.672 ; 104.954,69.9 cw(c104.726,69.672) 105.048,69.672 ; 104.954,69.9 cw(c104.726,69.672) 105.048,69.672 ; v1@105.009,66.441 ccw(c104.225,67.225) 105.334,67.225 ; v1@105.009,66.441 ccw(c104.225,67.225) 105.334,67.225 ; v1@105.009,66.441 ccw(c104.225,67.225) 105.334,67.225 ; v1@105.009,67.773 cw(c104.225,66.989) 105.334,66.989 ; v1@105.009,67.773 cw(c104.225,66.989) 105.334,66.989 ; v1@105.009,67.773 cw(c104.225,66.989) 105.334,66.989 ; v1@105.009,67.914 ccw(c104.225,68.698) 105.334,68.698 ; v1@105.009,67.914 ccw(c104.225,68.698) 105.334,68.698 ; v1@105.009,67.914 ccw(c104.225,68.698) 105.334,68.698 ; v1@105.176,66.396 cw(c105.728,66.544) 105.233,66.83 ; v1@105.176,66.396 cw(c105.728,66.544) 105.233,66.83 ; v1@105.176,66.396 cw(c105.728,66.544) 105.233,66.83 ; v1@105.176,67.818 ccw(c105.728,67.67) 105.233,67.384 ; v1@105.176,67.818 ccw(c105.728,67.67) 105.233,67.384 ; v1@105.176,67.818 ccw(c105.728,67.67) 105.233,67.384 ; v1@105.176,67.869 cw(c105.728,68.017) 105.233,68.303 ; v1@105.176,67.869 cw(c105.728,68.017) 105.233,68.303 ; v1@105.176,67.869 cw(c105.728,68.017) 105.233,68.303
  other v1: 102.616,66.116 103.835,66.142 105.08,66.37 104.089,67.285 105.08,67.843 104.038,68.605 104.648,69.672 102.565,69.698 103.621,70.416
PB7: C10.1 R11.2 R12.2 U1.5 | length 25.8
  Top Layer w0.254: U1.5@99.825,86.277 104.616,86.277 105.003,86.664 106.85,86.664 R12.2@106.85,86.932 ; U1.5@100.437,86.19 cw(c100.647,85.98) 100.647,86.277 ; U1.5@100.437,86.19 cw(c100.647,85.98) 100.647,86.277 ; U1.5@100.437,86.19 cw(c100.647,85.98) 100.647,86.277 ; U1.5@100.437,86.364 ccw(c100.647,86.574) 100.647,86.277 ; U1.5@100.437,86.364 ccw(c100.647,86.574) 100.647,86.277 ; U1.5@100.437,86.364 ccw(c100.647,86.574) 100.647,86.277 ; 105.254,86.664 ccw(c105.254,88.478) R12.2@106.536,87.196 ; 105.254,86.664 ccw(c105.254,88.478) R12.2@106.536,87.196 ; 105.254,86.664 ccw(c105.254,88.478) R12.2@106.536,87.196 ; 105.867,86.664 ccw(c105.867,87.865) R12.2@106.716,87.016 ; 105.867,86.664 ccw(c105.867,87.865) R12.2@106.716,87.016 ; 105.867,86.664 ccw(c105.867,87.865) R12.2@106.716,87.016 ; 105.903,86.83 cw(c106.134,86.432) R12.2@106.502,86.708 ; 105.903,86.83 cw(c106.134,86.432) R12.2@106.502,86.708 ; 105.903,86.83 cw(c106.134,86.432) R12.2@106.502,86.708 ; 106.152,86.974 cw(c106.364,86.605) R12.2@106.705,86.86 ; 106.152,86.974 cw(c106.364,86.605) R12.2@106.705,86.86 ; 106.152,86.974 cw(c106.364,86.605) R12.2@106.705,86.86 ; 106.235,86.739 ccw(c106.025,87.103) R12.2@106.436,87.012 ; 106.235,86.739 cw(c106.347,86.546) R12.2@106.516,86.69 ; 106.235,86.739 ccw(c106.025,87.103) R12.2@106.436,87.012 ; 106.235,86.739 cw(c106.347,86.546) R12.2@106.516,86.69 ; 106.235,86.739 ccw(c106.025,87.103) R12.2@106.436,87.012 ; 106.235,86.739 cw(c106.347,86.546) R12.2@106.516,86.69
  Top Layer w0.6: C10.1@106.85,84.932 R12.2@106.85,86.932 R11.2@106.85,88.932
PC0: 
Q1-B: Q1.1 R13.1 R21.2 | length 36
  Top Layer w0.3: R13.1@106.85,90.856 106.85,91.973 ; R21.2@106.85,92.9 106.85,91.973 ; Q1.1@110.55,92.45 110.073,91.973 ; R13.1@106.603,91.148 ccw(c106.005,91.745) 106.85,91.745 ; R13.1@106.603,91.148 ccw(c106.005,91.745) 106.85,91.745 ; R13.1@106.603,91.148 ccw(c106.005,91.745) 106.85,91.745 ; R21.2@106.603,92.752 cw(c106.005,92.155) 106.85,92.155 ; R21.2@106.603,92.752 cw(c106.005,92.155) 106.85,92.155 ; R21.2@106.603,92.752 cw(c106.005,92.155) 106.85,92.155 ; 106.85,91.745 ccw(c107.695,91.745) R13.1@107.098,91.148 ; 106.85,91.745 ccw(c107.695,91.745) R13.1@107.098,91.148 ; 106.85,91.745 ccw(c107.695,91.745) R13.1@107.098,91.148 ; 106.85,91.973 110.073,91.973 ; 106.85,92.155 cw(c107.695,92.155) R21.2@107.097,92.752 ; 106.85,92.155 cw(c107.695,92.155) R21.2@107.097,92.752 ; 106.85,92.155 cw(c107.695,92.155) R21.2@107.097,92.752 ; 108.735,91.973 ccw(c108.735,94.24) Q1.1@110.338,92.637 ; 108.735,91.973 ccw(c108.735,94.24) Q1.1@110.338,92.637 ; 108.735,91.973 ccw(c108.735,94.24) Q1.1@110.338,92.637 ; 109.46,91.973 ccw(c109.46,93.515) Q1.1@110.55,92.425 ; 109.46,91.973 ccw(c109.46,93.515) Q1.1@110.55,92.425 ; 109.46,91.973 ccw(c109.46,93.515) Q1.1@110.55,92.425 ; 109.467,92.134 cw(c109.962,91.277) Q1.1@110.413,92.158 ; 109.467,92.134 cw(c109.962,91.277) Q1.1@110.413,92.158 ; 109.467,92.134 cw(c109.962,91.277) Q1.1@110.413,92.158 ; 109.923,92.063 ccw(c109.561,92.69) Q1.1@110.26,92.503 ; 109.923,92.063 cw(c110.285,91.436) Q1.1@110.472,92.135 ; 109.923,92.063 ccw(c109.561,92.69) Q1.1@110.26,92.503 ; 109.923,92.063 cw(c110.285,91.436) Q1.1@110.472,92.135 ; 109.923,92.063 ccw(c109.561,92.69) Q1.1@110.26,92.503 ; 109.923,92.063 cw(c110.285,91.436) Q1.1@110.472,92.135 ; 109.944,92.41 cw(c110.261,91.861) Q1.1@110.55,92.425 ; 109.944,92.41 cw(c110.261,91.861) Q1.1@110.55,92.425 ; 109.944,92.41 cw(c110.261,91.861) Q1.1@110.55,92.425 ; 110.073,91.973 ccw(c109.646,92.401) Q1.1@110.25,92.417 ; 110.073,91.973 cw(c110.453,91.594) Q1.1@110.515,92.127 ; 110.073,91.973 ccw(c109.646,92.401) Q1.1@110.25,92.417 ; 110.073,91.973 cw(c110.453,91.594) Q1.1@110.515,92.127 ; 110.073,91.973 ccw(c109.646,92.401) Q1.1@110.25,92.417 ; 110.073,91.973 cw(c110.453,91.594) Q1.1@110.515,92.127 ; 110.184,91.973 ccw(c110.184,92.791) Q1.1@110.762,92.213 ; 110.184,91.973 ccw(c110.184,92.791) Q1.1@110.762,92.213 ; 110.184,91.973 ccw(c110.184,92.791) Q1.1@110.762,92.213
Q2-C: FMQ.1 Q2.3 | length 15
  Top Layer w0.4: 80.815,86.105 cw(c79.876,85.166) FMQ.1@81.204,85.166 ; 80.84,86.08 cw(c79.901,85.141) FMQ.1@81.229,85.141 ; 80.84,86.105 cw(c79.901,85.166) FMQ.1@81.229,85.166 ; FMQ.1@81.636,85.305 80.543,86.397 80.543,91.694 81.599,92.75 Q2.3@82.3,92.75 ; 81.746,92.75 ccw(c81.746,93.354) Q2.3@82.173,92.927 ; 81.746,92.75 cw(c81.746,92.146) Q2.3@82.173,92.573 ; 81.746,92.75 ccw(c81.746,93.354) Q2.3@82.173,92.927 ; 81.746,92.75 cw(c81.746,92.146) Q2.3@82.173,92.573 ; 81.746,92.75 ccw(c81.746,93.354) Q2.3@82.173,92.927 ; 81.746,92.75 cw(c81.746,92.146) Q2.3@82.173,92.573
Q3-B: Q3.1 R5.1 | length 23.8
  Top Layer w0.3: R5.1@112.153,98.947 110.769,100.33 110.769,101.498 111.354,102.083 112.319,102.083 ; 113.04,102.804 112.319,102.083 ; 111.335,99.765 cw(c110.325,98.755) R5.1@111.753,98.755 ; 111.335,99.765 cw(c110.325,98.755) R5.1@111.753,98.755 ; 111.335,99.765 cw(c110.325,98.755) R5.1@111.753,98.755 ; 111.57,99.439 ccw(c112.502,99.688) R5.1@112.122,98.801 ; 111.57,99.439 ccw(c112.502,99.688) R5.1@112.122,98.801 ; 111.57,99.439 ccw(c112.502,99.688) R5.1@112.122,98.801 ; R5.1@111.847,99.253 cw(c111.349,98.755) R5.1@112.053,98.755 ; R5.1@111.847,99.253 cw(c111.349,98.755) R5.1@112.053,98.755 ; R5.1@111.847,99.253 cw(c111.349,98.755) R5.1@112.053,98.755 ; 112.319,102.083 ccw(c111.283,103.118) Q3.1@112.742,103.254 ; 112.319,102.083 ccw(c111.283,103.118) Q3.1@112.742,103.254 ; 112.319,102.083 ccw(c111.283,103.118) Q3.1@112.742,103.254 ; 112.637,102.641 cw(c113.612,102.475) Q3.1@113.04,103.282 ; 112.637,102.641 cw(c113.612,102.475) Q3.1@113.04,103.282 ; 112.637,102.641 cw(c113.612,102.475) Q3.1@113.04,103.282 ; 112.77,102.534 ccw(c112.109,103.195) Q3.1@113.04,103.282 ; 112.77,102.534 ccw(c112.109,103.195) Q3.1@113.04,103.282 ; 112.77,102.534 ccw(c112.109,103.195) Q3.1@113.04,103.282 ; Q3.1@112.864,103.04 cw(c112.722,102.845) 112.959,102.805 ; Q3.1@112.864,103.04 cw(c112.722,102.845) 112.959,102.805 ; Q3.1@112.864,103.04 cw(c112.722,102.845) 112.959,102.805 ; 112.959,102.805 cw(c113.196,102.765) Q3.1@113.127,102.995 ; 112.959,102.805 cw(c113.196,102.765) Q3.1@113.127,102.995 ; 112.959,102.805 cw(c113.196,102.765) Q3.1@113.127,102.995
R7: 
R10: 
R19: DW.2 R19.2 R20.2 U1.9 | length 95.6
  Top Layer w0.4: U1.9@98.6,89.967 v2(101.3,89.967) ; U1.9@98.635,89.867 cw(c98.876,89.626) 98.876,89.967 ; U1.9@98.635,89.867 cw(c98.876,89.626) 98.876,89.967 ; U1.9@98.635,89.867 cw(c98.876,89.626) 98.876,89.967
  Top Layer w0.7: v2@121.526,86.627 123.45,88.55 ; R19.2@123.266,89.184 123.266,90.875 R20.2@123.45,91.059 ; v2(124.257,68.021) DW.2@126.771,68.021 ; 122.308,87.408 ccw(c120.516,89.2) R19.2@123.05,89.2 ; 122.308,87.408 ccw(c120.516,89.2) R19.2@123.05,89.2 ; 122.308,87.408 ccw(c120.516,89.2) R19.2@123.05,89.2 ; 122.559,87.66 cw(c123.8,86.419) v2@123.8,88.173 ; 122.559,87.66 cw(c123.8,86.419) v2@123.8,88.173 ; 122.559,87.66 cw(c123.8,86.419) v2@123.8,88.173 ; 122.876,88.55 cw(c123.703,88.328) R19.2@123.275,89.07 ; 122.876,88.55 cw(c123.703,88.328) R19.2@123.275,89.07 ; 122.876,88.55 cw(c123.703,88.328) R19.2@123.275,89.07 ; 123.503,88.603 ccw(c122.906,89.2) R19.2@123.75,89.2 ; 123.503,88.603 ccw(c122.906,89.2) R19.2@123.75,89.2 ; 123.503,88.603 ccw(c122.906,89.2) R19.2@123.75,89.2 ; 125.008,68.021 ccw(c125.008,69.965) DW.2@126.382,68.59 ; 125.008,68.021 ccw(c125.008,69.965) DW.2@126.382,68.59 ; 125.008,68.021 ccw(c125.008,69.965) DW.2@126.382,68.59
  Bottom Layer w0.254: v2@123.8,87.986 123.571,87.757 ; v2@124.258,68.023 124.181,68.101 124.181,72.568 123.063,73.685 123.063,75.768 123.571,76.276 123.571,87.757 ; 123.571,87.097 cw(c124.866,87.097) v2@123.95,88.013 ; 123.571,87.097 cw(c124.866,87.097) v2@123.95,88.013 ; 123.571,87.097 cw(c124.866,87.097) v2@123.95,88.013 ; 123.571,87.697 cw(c123.825,87.697) v2@123.811,87.951 ; 123.571,87.697 cw(c123.825,87.697) v2@123.811,87.951 ; 123.571,87.697 cw(c123.825,87.697) v2@123.811,87.951 ; 123.571,87.71 cw(c124.253,87.71) v2@123.771,88.192 ; 123.571,87.71 cw(c124.253,87.71) v2@123.771,88.192 ; 123.571,87.71 cw(c124.253,87.71) v2@123.771,88.192 ; 123.571,87.757 ccw(c123.391,87.937) v2@123.613,88.06 ; 123.571,87.757 ccw(c123.391,87.937) v2@123.613,88.06 ; 123.571,87.757 ccw(c123.391,87.937) v2@123.613,88.06 ; v2@123.635,88.029 cw(c123.297,87.753) 123.675,87.535 ; v2@123.635,88.029 cw(c123.297,87.753) 123.675,87.535 ; v2@123.635,88.029 cw(c123.297,87.753) 123.675,87.535 ; 124.181,68.719 ccw(c124.955,68.719) v2@124.407,68.172 ; 124.181,68.719 ccw(c124.955,68.719) v2@124.407,68.172 ; 124.181,68.719 ccw(c124.955,68.719) v2@124.407,68.172
  Bottom Layer w0.3: v2(101.3,89.967) 111.339,89.967 116.546,95.174 116.561,95.174 121.107,95.174 121.895,94.386 121.895,87.02 v2(121.514,86.639) ; v2@101.434,89.832 cw(c101.759,89.508) 101.759,89.967 ; v2@101.434,89.832 cw(c101.759,89.508) 101.759,89.967 ; v2@101.434,89.832 cw(c101.759,89.508) 101.759,89.967 ; v2@101.434,90.101 ccw(c101.759,90.425) 101.759,89.967 ; v2@101.434,90.101 ccw(c101.759,90.425) 101.759,89.967 ; v2@101.434,90.101 ccw(c101.759,90.425) 101.759,89.967 ; v2@121.514,86.829 ccw(c121.514,87.288) 121.838,86.964 ; v2@121.514,86.829 ccw(c121.514,87.288) 121.838,86.964 ; v2@121.514,86.829 ccw(c121.514,87.288) 121.838,86.964 ; v2@121.704,86.639 cw(c122.162,86.639) 121.838,86.964 ; v2@121.704,86.639 cw(c122.162,86.639) 121.838,86.964 ; v2@121.704,86.639 cw(c122.162,86.639) 121.838,86.964
  other v2: 123.8,88.163
R21: Q2.1 R10.1 R14.2 | length 36.3
  Top Layer w0.254: R14.2@81.559,88.427 R10.1@83.259,90.127 ; R14.2@81.61,88.2 R14.2@81.61,88.6 ; R14.2@81.615,88.41 ccw(c81.208,89.417) 82.257,89.136 ; R14.2@81.615,88.41 ccw(c81.208,89.417) 82.257,89.136 ; R14.2@81.615,88.41 ccw(c81.208,89.417) 82.257,89.136 ; R14.2@81.66,88.673 ccw(c81.66,89.024) R14.2@81.908,88.776 ; R14.2@81.66,88.673 ccw(c81.66,89.024) R14.2@81.908,88.776 ; R14.2@81.66,88.673 ccw(c81.66,89.024) R14.2@81.908,88.776 ; R14.2@81.711,88.175 ccw(c81.448,88.825) R14.2@82.125,88.643 ; R14.2@81.711,88.175 ccw(c81.448,88.825) R14.2@82.125,88.643 ; R14.2@81.711,88.175 ccw(c81.448,88.825) R14.2@82.125,88.643 ; R14.2@81.779,88.3 cw(c82.616,88.3) 82.024,88.892 ; R14.2@81.779,88.3 cw(c82.616,88.3) 82.024,88.892 ; R14.2@81.779,88.3 cw(c82.616,88.3) 82.024,88.892 ; R14.2@82.033,88.3 cw(c83.483,88.3) 82.458,89.326 ; R14.2@82.033,88.3 cw(c83.483,88.3) 82.458,89.326 ; R14.2@82.033,88.3 cw(c83.483,88.3) 82.458,89.326 ; 82.431,89.299 ccw(c81.329,90.4) R10.1@82.887,90.4 ; 82.431,89.299 ccw(c81.329,90.4) R10.1@82.887,90.4 ; 82.431,89.299 ccw(c81.329,90.4) R10.1@82.887,90.4 ; 82.654,89.529 cw(c83.774,89.229) R10.1@83.308,90.291 ; 82.654,89.529 cw(c83.774,89.229) R10.1@83.308,90.291 ; 82.654,89.529 cw(c83.774,89.229) R10.1@83.308,90.291 ; R10.1@82.791,90.04 cw(c83.501,89.85) R10.1@83.206,90.524 ; R10.1@82.791,90.04 cw(c83.501,89.85) R10.1@83.206,90.524 ; R10.1@82.791,90.04 cw(c83.501,89.85) R10.1@83.206,90.524 ; 82.864,89.732 ccw(c82.196,90.4) R10.1@83.141,90.4 ; 82.864,89.732 ccw(c82.196,90.4) R10.1@83.141,90.4 ; 82.864,89.732 ccw(c82.196,90.4) R10.1@83.141,90.4
  Top Layer w0.4: Q2.1@83.033,95.504 83.312,95.225 R10.1@83.312,90.5 ; R10.1@83.098,90.612 ccw(c82.581,91.129) 83.312,91.129 ; R10.1@83.098,90.612 ccw(c82.581,91.129) 83.312,91.129 ; R10.1@83.098,90.612 ccw(c82.581,91.129) 83.312,91.129 ; Q2.1@83.123,95.048 cw(c82.668,94.593) 83.312,94.593 ; Q2.1@83.123,95.048 cw(c82.668,94.593) 83.312,94.593 ; Q2.1@83.123,95.048 cw(c82.668,94.593) 83.312,94.593 ; 83.312,91.119 ccw(c84.029,91.119) R10.1@83.522,90.612 ; 83.312,91.119 ccw(c84.029,91.119) R10.1@83.522,90.612 ; 83.312,91.119 ccw(c84.029,91.119) R10.1@83.522,90.612 ; 83.312,94.65 cw(c83.875,94.65) Q2.1@83.477,95.048 ; 83.312,94.65 cw(c83.875,94.65) Q2.1@83.477,95.048 ; 83.312,94.65 cw(c83.875,94.65) Q2.1@83.477,95.048